# Altium PCB HeartLED.PcbDoc (part 2 of 2)
Units mm, origin at the board's own origin, x right, y up, seen from the top; angles counter-clockwise.
Board outline 86.89 x 91.89 mm, 2 copper layers (Top Layer, Bottom Layer); 133 components, 85 nets, 403 pads, 64 vias.
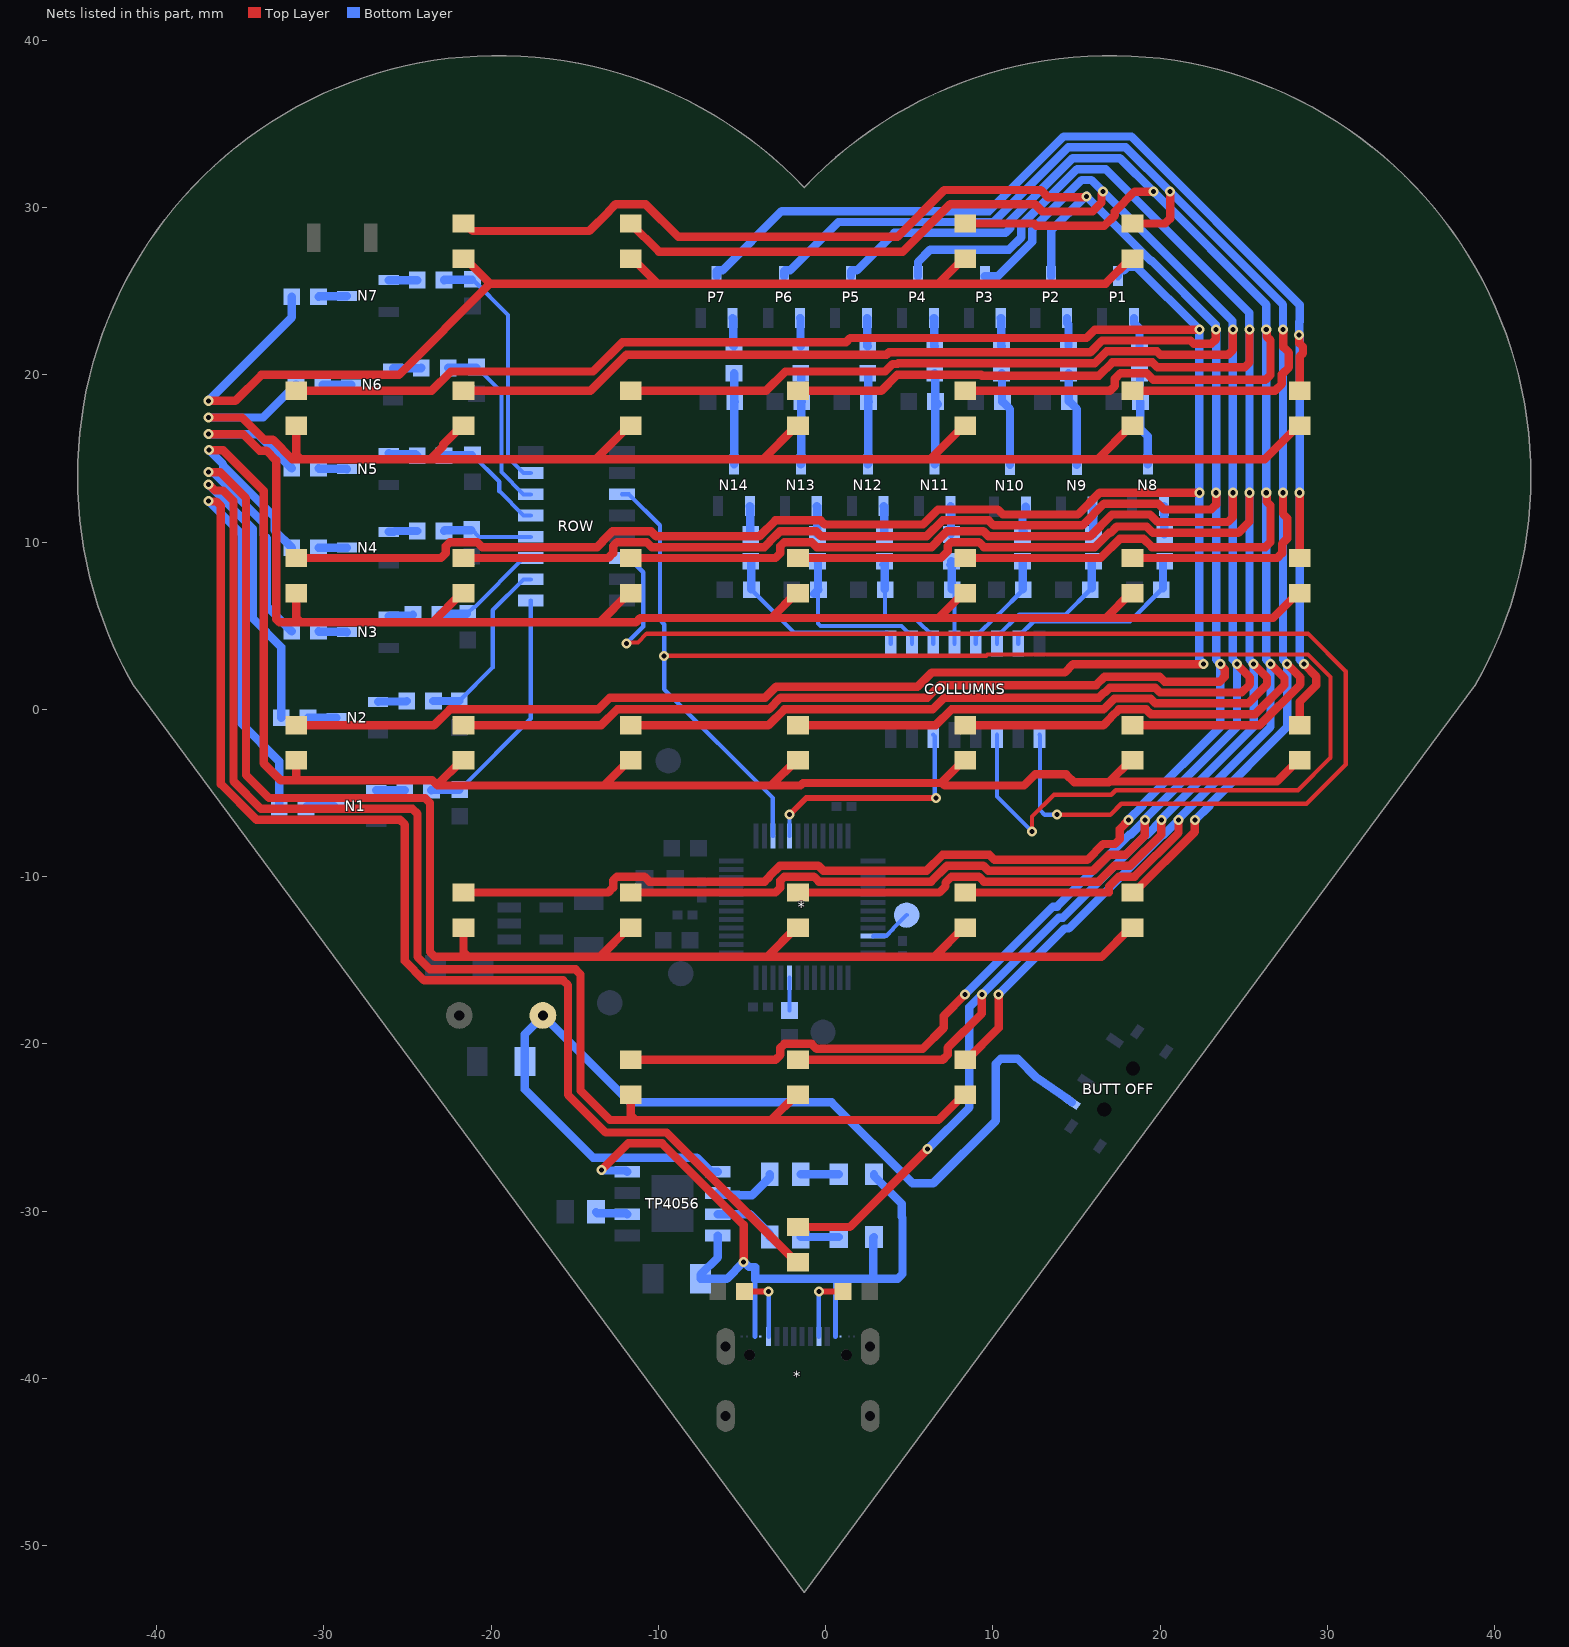
[diagram p2: the nets of this part, all layers, seen from the top]

## Via types
v1: diameter 0.6, hole 0.3, Top Layer to Bottom Layer, 64 vias

## Nets (pads, with @x,y where several pads share a name; then routed paths per layer and width w, separated by ;. In a path a pad name is that pad's centre, name@x,y a point inside that pad or via, vN(x,y) a via of type N, cw(c..) or ccw(c..) an arc to the next point about the centre after c; other vN are vias at no path point) (continued)
Net*_15: *.15 COLLUMNS.11 ROW.11 | length 96.5
  Top Layer w0.254: v1(-9.65,3.2) 9.603,3.2 9.68,3.277 28.839,3.277 30.189,1.927 30.189,-2.889 28.241,-4.838 17.348,-4.838 17.082,-5.104 13.658,-5.104 12.35,-6.413 v1(12.35,-7.3)
  Bottom Layer w0.254: ROW.11@-12.175,12.855 -11.75,12.855 -9.9,11.005 -9.9,5.339 -9.65,5.089 v1(-9.65,3.2) -9.65,1.2 -3.15,-5.3 *.15@-3.15,-7.574 *.15@-3.127,-7.551 ; COLLUMNS.11@10.255,-1.525 10.255,-5.205 v1(12.35,-7.3)
Net*_17: *.17 COLLUMNS.14 | length 14.3
  Top Layer w0.254: v1(6.6,-5.3) v1@6.625,-5.325
  Top Layer w0.35: v1(-2.15,-6.3) -1.15,-5.3 v1(6.6,-5.3)
  Bottom Layer w0.254: *.17@-2.15,-7.574 v1(-2.15,-6.3) ; COLLUMNS.14@6.445,-1.525 6.534,-1.614 6.534,-5.234 v1(6.6,-5.3)
Net*_44: *.44 R55.2 | length 2
  Bottom Layer w0.254: R55.2@-2.15,-18 *.44@-2.15,-16.05
Net*_A4: *.A4 *.A9 *.B4 *.B9 C1.2 LED35.2 LED36.2 TP4056.4 TP4056.8 | length 47.6
  Top Layer w0.5: v1(-13.4,-27.55) -11.8,-25.95 -9.769,-25.95 -4.9,-30.819 v1(-4.9,-33.05)
  Bottom Layer w0.3: *.A9@-4.205,-37.507 -4.205,-34.105 -4.15,-34.05 ; *.B9@0.601,-37.507 0.601,-34.051
  Bottom Layer w0.5: v1(-13.4,-27.55) -13.381,-27.569 -11.938,-27.569 TP4056.4@-11.862,-27.645 ; TP4056.8@-6.438,-31.455 -6.438,-32.763 -7.475,-33.8 C1.2@-7.475,-34.05 -5.9,-34.05 v1(-4.9,-33.05) -4.873,-33.05 -4.58,-33.343 -4.205,-33.343 -4.205,-34.05 -4.205,-34.105 ; -4.15,-34.05 0.6,-34.05 ; 0.601,-34.051 2.85,-34.051 ; LED36.2@2.9,-31.55 2.85,-31.6 2.85,-34.051 ; LED35.2@2.9,-27.8 2.9,-27.9 4.55,-29.55 4.55,-30.338 4.6,-30.388 4.6,-33.758 4.307,-34.051 2.85,-34.051
Net*_A5: *.A5 R53.1 | length 4.2
  Top Layer w0.35: v1(-0.4,-34.8) R53.1@1.05,-34.8
  Bottom Layer w0.254: *.A5@-0.4,-37.507 v1@-0.4,-34.8
Net*_B5: *.B5 R54.2 | length 4.2
  Top Layer w0.35: R54.2@-4.85,-34.8 v1(-3.4,-34.8)
  Bottom Layer w0.254: *.B5@-3.4,-37.507 v1(-3.4,-34.8)
NetBAT_1: "BUTT OFF.C1" BAT.1 C2.2 TP4056.5 | length 60.2
  Bottom Layer w0.5: TP4056.5@-6.438,-27.645 -6.85,-27.645 -7.695,-26.8 -13.9,-26.8 -17.975,-22.725 C2.2@-17.975,-21.05 -17.975,-19.417 -16.9,-18.342 BAT.1@-16.9,-18.3 -11.703,-23.497 0.363,-23.497 5.2,-28.334 6.441,-28.334 10.175,-24.6 10.175,-21.193 10.468,-20.9 11.5,-20.9 12.625,-22.025 14.514,-23.339 14.719,-23.482
NetCOLLUMNS_1: COLLUMNS.1 R36.2 R37.2 | length 11.6
  Bottom Layer w0.254: R37.2@-4.425,7.15 -1.848,4.573 3.682,4.573 3.905,4.35 COLLUMNS.1@3.905,3.925
  Bottom Layer w0.5: R37.2@-4.45,7.175 R36.2@-4.45,8.825
NetCOLLUMNS_2: COLLUMNS.2 R38.2 R39.2 | length 10.5
  Bottom Layer w0.254: R39.2@-0.45,7.175 -0.45,7.125 -0.45,5.126 -0.301,4.977 4.548,4.977 5.175,4.35 COLLUMNS.2@5.175,3.925
  Bottom Layer w0.5: R39.2@-0.675,6.9 -0.45,7.125 R39.2@-0.425,7.15 ; R38.2@-0.475,8.85 -0.45,8.825 R39.2@-0.45,7.175
NetCOLLUMNS_3: COLLUMNS.3 R40.2 R41.2 | length 7.5
  Bottom Layer w0.254: R40.2@3.325,8.65 R40.2@3.525,8.85 ; R41.2@3.575,7.15 3.55,7.175 3.55,5.53 3.699,5.381 5.414,5.381 6.445,4.35 COLLUMNS.3@6.445,3.925
  Bottom Layer w0.5: R40.2@3.525,8.85 3.55,8.825 R41.2@3.55,7.175
NetCOLLUMNS_4: COLLUMNS.4 R42.2 R43.2 | length 5.3
  Bottom Layer w0.254: R42.2@7.325,8.65 R42.2@7.525,8.85 ; R43.2@7.55,7.175 R43.2@7.575,7.15 7.715,7.01 COLLUMNS.4@7.715,3.925
  Bottom Layer w0.5: R42.2@7.525,8.85 7.55,8.825 R43.2@7.55,7.175
NetCOLLUMNS_5: COLLUMNS.5 R44.2 R45.2 | length 6.1
  Bottom Layer w0.254: COLLUMNS.5@8.985,3.925 8.985,4.35 10.31,5.675 10.35,5.675 R45.2@11.825,7.15 ; R44.2@11.775,8.85 11.8,8.825 R44.2@11.825,8.8
  Bottom Layer w0.5: R45.2@11.8,7.175 R44.2@11.8,8.825
NetCOLLUMNS_6: COLLUMNS.6 R46.2 R47.2 | length 8.9
  Bottom Layer w0.254: COLLUMNS.6@10.255,3.925 10.255,4.35 11.58,5.675 14.35,5.675 R47.2@15.825,7.15 ; R46.2@15.825,8.65 15.925,8.75 R46.2@16.025,8.85
  Bottom Layer w0.5: R47.2@15.925,7.25 R46.2@15.925,8.75
NetCOLLUMNS_7: COLLUMNS.7 R48.2 R49.2 | length 11.9
  Bottom Layer w0.254: COLLUMNS.7@11.525,3.925 11.525,4.35 12.446,5.271 18.196,5.271 R49.2@20.075,7.15 ; R48.2@20.075,8.65 20.175,8.75 R48.2@20.275,8.85
  Bottom Layer w0.5: R49.2@20.175,7.25 R48.2@20.175,8.75
NetCOLLUMNS_9: COLLUMNS.9 ROW.14 | length 80.2
  Top Layer w0.254: v1(-11.9,3.95) -11.847,4.003 -11.219,4.003 -10.695,4.527 28.844,4.527 31.1,2.271 31.1,-3.3 28.754,-5.646 17.683,-5.646 17.029,-6.3 v1(13.85,-6.3)
  Bottom Layer w0.254: ROW.14@-12.175,9.045 -11.75,9.045 -10.9,8.195 -10.9,4.95 v1(-11.9,3.95) ; COLLUMNS.9@12.795,-1.525 12.822,-1.552 12.822,-6.022 13.1,-6.3 v1(13.85,-6.3)
NetLED1_1: LED1.1 LED2.1 LED3.1 LED4.1 R19.2 | length 73.7
  Top Layer w0.5: v1(-36.9,18.45) -35.286,18.45 -33.736,20 -25.5,20 -20.05,25.45 ; LED1.1@-21.65,26.95 -21.55,26.95 -20.05,25.45 ; LED2.1@-11.65,26.95 -11.55,26.95 -10.05,25.45 ; LED3.1@8.35,26.95 8.25,26.95 6.75,25.45 ; LED4.1@18.35,26.95 18.25,26.95 16.75,25.45 6.75,25.45 ; -20.05,25.45 -10.05,25.45 ; -10.05,25.45 6.75,25.45
  Bottom Layer w0.5: v1(-36.9,18.45) -31.914,23.436 R19.2@-31.914,24.664
NetLED1_2: LED1.2 LED6.2 LED13.2 LED20.2 LED26.2 P2.3 | length 275
  Top Layer w0.5: LED26.2@-21.65,-10.95 -12.993,-10.95 -12.7,-10.657 -12.7,-10.234 -12.466,-10 -10.834,-10 -10.534,-10.3 -3.643,-10.3 -3.35,-10.007 -3.35,-9.965 -2.735,-9.35 -0.431,-9.35 -0.131,-9.65 6.046,-9.65 6.996,-8.7 9.8,-8.7 10.1,-9 15.65,-9 16.6,-8.05 17.307,-8.05 17.6,-7.757 17.6,-7.154 18.1,-6.654 v1(18.1,-6.627) ; LED20.2@-21.65,-0.95 -13.416,-0.95 -12.466,0 -3.385,0 -2.685,0.7 6.1,0.7 6.85,1.45 16.181,1.45 16.681,1.95 19.973,1.95 20.267,1.657 23.572,1.657 23.865,1.95 23.865,2.408 23.6,2.673 v1(23.6,2.7) ; LED13.2@-21.65,9.05 -12.993,9.05 -12.7,9.343 -12.7,9.766 -12.466,10 -10.7,10 -10.4,9.7 -3.65,9.7 -3.35,10 -3.35,10.035 -2.735,10.65 -0.565,10.65 -0.265,10.35 6.046,10.35 6.996,11.3 9.75,11.3 10.05,11 15.355,11 16.655,12.3 19.878,12.3 20.228,11.95 23.057,11.95 23.35,12.243 v1(23.35,12.95) ; LED6.2@-21.65,19.05 -14.05,19.05 -11.9,21.2 3.644,21.2 3.794,21.35 15.831,21.35 16.531,22.05 21.825,22.05 22.025,21.85 23.057,21.85 23.331,22.124 23.331,22.681 v1(23.35,22.7) ; LED1.2@-21.65,29.05 -21.55,29.05 -21.1,28.6 -14.129,28.6 -12.925,29.804 -12.925,29.824 -12.549,30.2 -10.751,30.2 -8.801,28.25 4.299,28.25 7.099,31.05 12.875,31.05 13.308,30.617 15.523,30.617 15.573,30.667 v1(15.6,30.667)
  Bottom Layer w0.5: P2.3@13.489,25.9 13.489,28.627 15.51,30.648 15.581,30.648 v1(15.6,30.667) ; v1@15.633,30.7 15.633,30.645 19.461,26.816 19.507,26.816 23.331,22.992 23.331,22.719 v1(23.35,22.7) v1(23.35,12.95) 23.35,2.977 23.6,2.727 v1(23.6,2.7) 23.6,-1.05 18.981,-5.669 18.981,-5.746 v1(18.1,-6.627)
NetLED2_2: LED2.2 LED7.2 LED14.2 LED21.2 LED27.2 LED31.2 P3.3 | length 273.6
  Top Layer w0.5: LED31.2@-11.65,-20.95 -2.993,-20.95 -2.7,-20.657 -2.7,-20.234 -2.466,-20 -0.834,-20 -0.534,-20.3 5.807,-20.3 7.069,-19.038 7.069,-18.331 v1(8.35,-17.05) ; LED27.2@-11.65,-10.95 -2.993,-10.95 -2.7,-10.657 -2.7,-10.234 -2.466,-10 -0.7,-10 -0.4,-10.3 6.315,-10.3 7.265,-9.35 9.435,-9.35 9.735,-9.65 16,-9.65 16.95,-8.7 17.942,-8.7 19.081,-7.561 19.081,-6.646 v1(19.1,-6.627) ; LED21.2@-11.65,-0.95 -3.416,-0.95 -2.466,0 6.4,0 7.1,0.7 16.35,0.7 16.657,1.007 16.703,1.007 16.996,1.3 19.704,1.3 19.997,1.007 24.88,1.007 25.366,1.493 25.366,1.907 24.6,2.673 v1(24.6,2.7) ; LED14.2@-11.65,9.05 -2.993,9.05 -2.7,9.343 -2.7,9.766 -2.466,10 -0.834,10 -0.534,9.7 6.35,9.7 6.65,10 6.65,10.035 7.265,10.65 9.435,10.65 9.735,10.35 15.831,10.35 17.131,11.65 19.4,11.65 19.85,11.2 24.057,11.2 24.35,11.493 v1(24.35,12.95) ; LED7.2@-11.65,19.05 -3.55,19.05 -2.4,20.2 3.564,20.2 4.014,20.65 4.3,20.65 4.35,20.7 16.1,20.7 16.8,21.4 19.819,21.4 20.019,21.2 24.057,21.2 24.35,21.493 v1(24.35,22.7) ; LED2.2@-11.65,29.05 -9.969,27.369 4.621,27.369 7.451,30.2 12.523,30.2 12.956,29.767 15.973,29.767 16.5,30.294 16.5,30.823 16.6,30.923 v1(16.6,30.95)
  Bottom Layer w0.5: v1(8.35,-17.05) 13.6,-11.8 13.85,-11.8 18.142,-7.508 18.219,-7.508 v1(19.1,-6.627) ; P3.3@9.525,25.9 10.3,25.9 12.35,27.95 12.35,28.69 15.31,31.65 15.89,31.65 16.59,30.95 v1(16.6,30.95) 24.331,23.219 24.331,22.719 v1(24.35,22.7) v1(24.35,12.95) 24.35,2.977 24.6,2.727 v1(24.6,2.7) 24.6,-1.05 19.1,-6.55 v1@19.062,-6.589
NetLED3_2: LED3.2 LED9.2 LED16.2 LED23.2 LED29.2 LED33.2 P5.3 | length 178.4
  Top Layer w0.5: LED33.2@8.35,-20.95 8.45,-20.95 10.35,-19.05 v1(10.35,-17.05) ; LED29.2@8.35,-10.95 16.95,-10.95 16.95,-10.584 17.534,-10 18.481,-10 21.1,-7.381 v1(21.1,-6.627) ; LED23.2@8.35,-0.95 16.607,-0.95 17.071,-0.486 17.071,-0.464 17.534,0 19.166,0 19.459,-0.293 25.688,-0.293 27.438,1.458 27.438,1.872 26.61,2.7 v1(26.6,2.7) ; LED16.2@8.35,9.05 16.45,9.05 17.6,10.2 19.012,10.2 19.512,9.7 26.307,9.7 26.6,9.993 26.6,12.2 26.369,12.431 26.369,12.931 v1(26.35,12.95) ; LED9.2@8.35,19.05 17.007,19.05 17.3,19.343 17.3,19.766 17.634,20.1 19.2,20.1 19.6,19.7 26.307,19.7 26.6,19.993 26.6,22.069 26.369,22.3 26.369,22.681 v1(26.35,22.7) ; LED3.2@8.35,29.05 12.471,29.05 12.604,28.917 16.674,28.917 17.3,29.543 17.3,29.766 18.484,30.95 v1(19.6,30.95)
  Bottom Layer w0.5: P5.3@1.525,25.9 1.525,26.2 1.575,26.25 1.875,26.25 4.113,28.488 10.757,28.488 11.05,28.781 11.05,29.228 14.772,32.95 17.6,32.95 v1(19.6,30.95) 26.35,24.2 v1(26.35,22.7) v1(26.35,12.95) 26.35,2.977 26.6,2.727 v1(26.6,2.7) 26.6,-1.05 21.1,-6.55 v1@21.061,-6.589 ; v1(10.35,-17.05) 14.3,-13.1 14.55,-13.1 20.142,-7.508 20.219,-7.508 v1(21.1,-6.627)
NetLED4_2: LED4.2 LED10.2 LED17.2 LED24.2 LED30.2 P6.3 | length 118.4
  Top Layer w0.5: LED30.2@18.35,-10.95 18.45,-10.95 22.081,-7.319 v1(22.081,-6.627) ; LED24.2@18.35,-0.95 25.95,-0.95 28.393,1.493 28.393,1.907 v1(27.6,2.7) ; LED17.2@18.35,9.05 27.007,9.05 27.3,9.343 27.3,9.9 27.6,10.2 27.6,11.436 27.35,11.686 v1(27.35,12.95) ; LED10.2@18.35,19.05 26.869,19.05 27.285,19.465 27.285,20.035 27.7,20.45 27.7,21.323 27.369,21.654 27.369,22.681 v1(27.35,22.7) ; LED4.2@18.35,29.05 20.307,29.05 20.6,29.343 v1(20.6,30.95)
  Bottom Layer w0.5: P6.3@-2.475,25.9 -2.475,26.2 -2.425,26.25 -2.125,26.25 0.763,29.138 10.057,29.138 10.35,29.431 10.35,29.448 14.502,33.6 17.95,33.6 v1(20.6,30.95) 27.35,24.2 v1(27.35,22.7) v1(27.35,12.95) 27.35,2.977 27.6,2.727 v1(27.6,2.7) 27.6,-1.05 22.971,-5.679 22.971,-5.737 v1(22.081,-6.627)
NetLED5_1: LED5.1 LED6.1 LED7.1 LED8.1 LED9.1 LED10.1 LED11.1 R16.2 | length 89.9
  Top Layer w0.5: v1(-36.9,17.45) -34.892,17.45 -33.565,16.122 -33.047,16.122 -31.875,14.95 -31.357,14.95 ; LED5.1@-31.65,16.95 -31.65,15.243 -31.357,14.95 ; LED6.1@-21.65,16.95 -21.75,16.95 -22.85,15.85 -22.85,15.75 -23.65,14.95 ; LED7.1@-11.65,16.95 -11.75,16.95 -13.75,14.95 ; LED8.1@-1.65,16.95 -1.75,16.95 -3.75,14.95 ; LED9.1@8.35,16.95 8.25,16.95 6.25,14.95 ; LED10.1@18.35,16.95 18.25,16.95 16.25,14.95 ; LED11.1@28.35,16.95 28.25,16.95 26.25,14.95 16.25,14.95 ; -31.357,14.95 -23.65,14.95 ; -23.65,14.95 -13.75,14.95 ; -13.75,14.95 -3.75,14.95 ; -3.75,14.95 6.25,14.95 ; 6.25,14.95 16.25,14.95
  Bottom Layer w0.5: v1(-36.9,17.45) -33.629,17.45 R16.2@-31.664,19.414
NetLED5_2: LED5.2 LED12.2 LED19.2 P1.3 | length 195.2
  Top Layer w0.5: LED12.2@-31.8,9.2 LED12.2@-31.65,9.05 -22.993,9.05 -22.7,9.343 -22.7,9.766 -22.466,10 -20.834,10 -20.534,9.7 -13.65,9.7 -13.35,10 -13.35,10.035 -12.735,10.65 -10.431,10.65 -10.131,10.35 -3.954,10.35 -3.004,11.3 -0.296,11.3 -0.048,11.052 5.829,11.052 6.727,11.95 10.3,11.95 10.6,11.65 15.086,11.65 16.386,12.95 v1(22.35,12.95) ; LED19.2@-31.65,-0.95 -23.416,-0.95 -22.466,0 -13.6,0 -12.9,0.7 -3.604,0.7 -2.954,1.35 5.5,1.35 6.35,2.2 14.307,2.2 14.807,2.7 v1(22.6,2.7) ; LED5.2@-31.65,19.05 -23.55,19.05 -22.4,20.2 -13.9,20.2 -12.15,21.95 1.225,21.95 1.475,22.2 15.6,22.2 16.1,22.7 v1(22.35,22.7)
  Bottom Layer w0.5: P1.3@17.489,25.9 17.489,26.2 17.539,26.25 17.839,26.25 18.039,26.45 18.6,26.45 v1(22.35,22.7) v1(22.35,12.95) 22.35,2.977 22.6,2.727 v1(22.6,2.7)
NetLED8_2: LED8.2 LED15.2 LED22.2 LED28.2 LED32.2 LED34.2 P4.3 | length 224.1
  Top Layer w0.5: LED34.2@-1.65,-30.95 1.45,-30.95 v1(6.1,-26.3) ; LED32.2@-1.65,-20.95 7.007,-20.95 7.3,-20.657 7.3,-20.234 9.35,-18.184 v1(9.35,-17.05) ; LED28.2@-1.65,-10.95 6.807,-10.95 7.171,-10.586 7.171,-10.364 7.534,-10 9.166,-10 9.466,-10.3 16.35,-10.3 16.35,-10.265 17.265,-9.35 18.212,-9.35 20.081,-7.481 20.081,-6.646 v1(20.1,-6.627) ; LED22.2@-1.65,-0.95 6.584,-0.95 7.534,0 16.615,0 17.265,0.65 19.435,0.65 19.728,0.357 25.257,0.357 26.393,1.493 26.393,1.907 v1(25.6,2.7) ; LED15.2@-1.65,9.05 6.9,9.05 7.3,9.45 7.3,9.766 7.534,10 9.166,10 9.466,9.7 16.1,9.7 16.95,10.55 17.031,10.55 17.412,10.931 19.2,10.931 19.581,10.55 24.676,10.55 25.35,11.224 v1(25.35,12.95) ; LED8.2@-1.65,19.05 3.333,19.05 4.283,20 9.3,20 9.35,19.95 16.35,19.95 17.15,20.75 19.55,20.75 19.85,20.45 25.057,20.45 25.35,20.743 v1(25.35,22.7)
  Bottom Layer w0.5: P4.3@5.525,25.9 5.525,26.75 6.26,27.485 10.965,27.485 11.7,28.219 11.7,28.959 15.041,32.3 16.75,32.3 25.331,23.719 25.331,22.719 v1(25.35,22.7) v1(25.35,12.95) 25.35,2.977 25.6,2.727 v1(25.6,2.7) 25.6,-1.05 20.1,-6.55 v1@20.061,-6.589 ; v1(6.1,-26.3) 8.6,-23.8 8.6,-17.8 v1(9.35,-17.05) 13.95,-12.45 14.2,-12.45 19.142,-7.508 19.219,-7.508 v1(20.1,-6.627)
NetLED11_2: LED11.2 LED18.2 LED25.2 P7.3 | length 76.1
  Top Layer w0.5: v1(28.308,22.391) 28.327,22.372 28.327,21.898 28.55,21.675 28.55,21.291 28.35,21.091 LED11.2@28.35,19.05 ; LED25.2@28.35,-0.95 28.35,0.45 29.35,1.45 29.35,1.95 v1(28.6,2.7) v1@28.6,2.673 ; LED18.2@28.35,9.05 v1(28.35,12.95)
  Bottom Layer w0.5: P7.3@-6.511,25.9 -6.511,26.2 -6.461,26.25 -6.161,26.25 -2.622,29.788 9.772,29.788 14.233,34.25 18.29,34.25 28.35,24.19 28.35,23.191 28.327,23.168 28.327,22.41 v1(28.308,22.391) ; v1@28.35,22.391 v1(28.35,12.95) 28.35,2.977 28.6,2.727 v1(28.6,2.7)
NetLED12_1: LED12.1 LED13.1 LED14.1 LED15.1 LED16.1 LED17.1 LED18.1 R13.2 | length 95.7
  Top Layer w0.5: v1(-36.9,16.45) -34.819,16.45 -33.842,15.472 -33.432,15.472 -32.846,14.887 -32.846,5.396 -32.65,5.2 -31.357,5.2 ; LED12.1@-31.65,6.95 -31.65,5.493 -31.357,5.2 ; LED13.1@-21.65,6.95 -21.75,6.95 -23.5,5.2 ; LED14.1@-11.65,6.95 -11.75,6.95 -13.5,5.2 ; LED15.1@-1.65,6.95 -1.75,6.95 -3.242,5.458 ; LED16.1@8.35,6.95 8.25,6.95 6.758,5.458 ; LED17.1@18.35,6.95 18.25,6.95 16.758,5.458 ; LED18.1@28.35,6.95 28.25,6.95 26.758,5.458 16.758,5.458 ; -31.357,5.2 -23.5,5.2 ; -23.5,5.2 -13.5,5.2 ; -13.5,5.2 -11.339,5.2 -11.081,5.458 -3.242,5.458 ; -3.242,5.458 6.758,5.458 ; 6.758,5.458 16.758,5.458
  Bottom Layer w0.5: v1(-36.9,16.45) -33.95,16.45 R13.2@-31.914,14.414
NetLED19_1: LED19.1 LED20.1 LED21.1 LED22.1 LED23.1 LED24.1 LED25.1 R10.2 | length 103.9
  Top Layer w0.5: v1(-36.873,15.502) -36.854,15.483 -36.011,15.483 -33.596,13.068 -33.596,-3.223 -32.573,-4.246 -31.65,-4.246 ; LED19.1@-31.65,-3.05 -31.65,-4.246 ; LED20.1@-21.65,-3.05 -21.75,-3.05 -23.226,-4.526 ; LED21.1@-11.65,-3.05 -11.75,-3.05 -13.25,-4.55 ; LED22.1@-1.65,-3.05 -1.75,-3.05 -3.25,-4.55 ; LED23.1@8.35,-3.05 8.25,-3.05 6.9,-4.4 ; LED24.1@18.35,-3.05 18.25,-3.05 16.989,-4.311 ; LED25.1@28.35,-3.05 28.25,-3.05 26.989,-4.311 16.989,-4.311 ; -31.65,-4.246 -23.506,-4.246 -23.226,-4.526 ; -23.226,-4.526 -23.202,-4.55 -13.25,-4.55 ; -13.25,-4.55 -3.25,-4.55 ; -3.25,-4.55 -1.496,-4.55 -1.346,-4.4 6.9,-4.4 ; 6.9,-4.4 6.973,-4.4 7.123,-4.55 11.863,-4.55 12.531,-3.882 14.387,-3.882 14.873,-4.369 16.931,-4.369 16.989,-4.311
  Bottom Layer w0.5: v1(-36.873,15.502) -36.027,14.656 -36.027,14.509 -35.988,14.47 -35.92,14.47 -32.95,11.5 -32.95,10.7 R10.2@-31.914,9.664
NetLED26_1: LED26.1 LED27.1 LED28.1 LED29.1 LED30.1 R7.2 | length 104.3
  Top Layer w0.5: v1(-36.9,14.201) -36.881,14.182 -36.2,14.182 -34.65,12.632 -34.65,-3.926 -33.276,-5.3 -23.943,-5.3 -23.65,-5.593 -23.65,-14.507 -23.357,-14.8 -21.357,-14.8 ; LED26.1@-21.65,-13.05 -21.65,-14.507 -21.357,-14.8 ; LED27.1@-11.65,-13.05 -11.75,-13.05 -13.5,-14.8 ; LED28.1@-1.65,-13.05 -1.75,-13.05 -3.5,-14.8 ; LED29.1@8.35,-13.05 8.25,-13.05 6.5,-14.8 ; LED30.1@18.35,-13.05 18.25,-13.05 16.5,-14.8 6.5,-14.8 ; -21.357,-14.8 -13.5,-14.8 ; -13.5,-14.8 -3.5,-14.8 ; -3.5,-14.8 6.5,-14.8
  Bottom Layer w0.5: v1(-36.9,14.201) -36.881,14.182 -36.632,14.182 -33.6,11.15 -33.6,10.431 -33.4,10.231 -33.4,6.15 R7.2@-31.914,4.664
NetLED31_1: LED31.1 LED32.1 LED33.1 R4.2 | length 100.1
  Top Layer w0.5: v1(-36.9,13.45) -36.873,13.45 -36.504,13.081 -36.018,13.081 -35.4,12.462 -35.4,-4.3 -33.75,-5.95 -24.693,-5.95 -24.4,-6.243 -24.4,-14.8 -23.65,-15.55 -14.943,-15.55 -14.65,-15.843 -14.65,-22.8 -12.9,-24.55 -11.357,-24.55 ; LED31.1@-11.65,-23.05 -11.65,-24.257 -11.357,-24.55 ; LED32.1@-1.65,-23.05 -1.75,-23.05 -3.25,-24.55 ; LED33.1@8.35,-23.05 8.25,-23.05 6.75,-24.55 -3.25,-24.55 ; -11.357,-24.55 -3.25,-24.55
  Bottom Layer w0.5: v1(-36.9,13.45) -34.25,10.8 -34.25,9.631 -34.235,9.615 -34.235,5.419 -32.546,3.73 R4.2@-32.546,-0.504
NetLED34_1: LED34.1 R1.2 | length 92.5
  Top Layer w0.5: v1(-36.9,12.45) -36.881,12.431 -36.424,12.431 -36.15,12.157 -36.15,-4.469 -34.019,-6.6 -25.443,-6.6 -25.15,-6.893 -25.15,-15.05 -24,-16.2 -15.693,-16.2 -15.4,-16.493 -15.4,-23.05 -13.15,-25.3 -9.5,-25.3 -1.75,-33.05 LED34.1@-1.65,-33.05
  Bottom Layer w0.5: v1(-36.9,12.45) -34.9,10.45 -34.9,-0.868 -32.664,-3.103 R1.2@-32.664,-5.836
NetLED35_1: LED35.1 R51.1 | length 2.3
  Bottom Layer w0.5: R51.1@-1.475,-27.8 LED35.1@0.8,-27.8
NetLED36_1: LED36.1 R52.1 | length 2.3
  Bottom Layer w0.5: R52.1@-1.475,-31.55 LED36.1@0.8,-31.55
NetN1_1: N1.1 R3.2 | length 1.7
  Bottom Layer w0.5: N1.1@-26.864,-4.836 R3.2@-25.164,-4.836
NetN1_3: N1.3 R1.1 | length 1.7
  Bottom Layer w0.254: R1.1@-31.064,-5.836 R1.1@-31.014,-5.786
  Bottom Layer w0.5: R1.1@-31.014,-5.786 N1.3@-29.364,-5.786
NetN2_1: N2.1 R6.2 | length 1.7
  Bottom Layer w0.5: N2.1@-26.746,0.446 -26.721,0.471 -25.071,0.471 R6.2@-25.046,0.496
NetN2_3: N2.3 R4.1 | length 1.7
  Bottom Layer w0.5: R4.1@-30.946,-0.504 N2.3@-29.246,-0.504
NetN3_1: N3.1 R9.2 | length 1.5
  Bottom Layer w0.5: N3.1@-26.114,5.564 -26.064,5.614 -24.714,5.614 R9.2@-24.664,5.664
NetN3_3: N3.3 R7.1 | length 1.7
  Bottom Layer w0.5: R7.1@-30.314,4.664 -30.289,4.639 -28.639,4.639 N3.3@-28.614,4.614
NetN4_1: N4.1 R12.2 | length 1.7
  Bottom Layer w0.5: N4.1@-26.114,10.614 -25.814,10.614 -25.764,10.664 R12.2@-24.414,10.664
NetN4_3: N4.3 R10.1 | length 1.7
  Bottom Layer w0.5: R10.1@-30.314,9.664 N4.3@-28.614,9.664
NetN5_1: N5.1 R15.2 | length 1.8
  Bottom Layer w0.5: N5.1@-26.114,15.314 -26.064,15.264 -24.514,15.264 R15.2@-24.414,15.164
NetN5_3: N5.3 R13.1 | length 1.7
  Bottom Layer w0.5: R13.1@-30.314,14.414 -30.289,14.389 -28.639,14.389 N5.3@-28.614,14.364
NetN6_1: N6.1 R18.1 | length 1.7
  Bottom Layer w0.5: N6.1@-25.864,20.364 -25.839,20.389 -24.189,20.389 R18.1@-24.164,20.414
NetN6_3: N6.3 R16.1 | length 1.7
  Bottom Layer w0.5: R16.1@-30.064,19.414 N6.3@-28.364,19.414
NetN7_1: N7.1 R21.2 | length 1.7
  Bottom Layer w0.5: N7.1@-26.114,25.664 R21.2@-24.414,25.664
NetN7_3: N7.3 R19.1 | length 1.7
  Bottom Layer w0.5: R19.1@-30.314,24.664 -30.289,24.689 -28.639,24.689 N7.3@-28.614,24.714
NetN8_1: N8.1 R48.1 | length 1.8
  Bottom Layer w0.254: R48.1@20.225,10.5 20.25,10.475 R48.1@20.275,10.45
  Bottom Layer w0.5: N8.1@20.225,12.15 20.25,12.125 R48.1@20.25,10.475
NetN8_3: N8.3 R22.2 R23.2 | length 5.7
  Bottom Layer w0.5: R22.2@18.775,20.1 18.8,20.075 18.8,18.425 R23.2@18.825,18.4 18.825,16.775 19.275,16.325 N8.3@19.275,14.65
NetN9_1: N9.1 R46.1 | length 1.7
  Bottom Layer w0.254: R46.1@15.975,10.5 16,10.475 R46.1@16.025,10.45
  Bottom Layer w0.5: N9.1@15.975,12.114 16,12.089 R46.1@16,10.475
NetN9_3: N9.3 R24.2 R25.2 | length 5.7
  Bottom Layer w0.5: R25.2@14.525,20.1 14.55,20.075 14.55,18.425 R24.2@14.575,18.4 15.025,17.95 N9.3@15.025,14.614
NetN10_1: N10.1 R44.1 | length 2
  Bottom Layer w0.254: R44.1@11.775,10.45 R44.1@11.975,10.65
  Bottom Layer w0.5: R44.1@11.775,10.45 11.775,11.614 11.975,11.814 N10.1@11.975,12.114
NetN10_3: N10.3 R26.2 R27.2 | length 5.7
  Bottom Layer w0.5: R27.2@10.525,20.1 10.55,20.075 10.55,18.425 R26.2@10.575,18.4 11.025,17.95 N10.3@11.025,14.614
NetN11_1: N11.1 R42.1 | length 1.8
  Bottom Layer w0.254: R42.1@7.475,10.5 7.5,10.475 R42.1@7.525,10.45
  Bottom Layer w0.5: N11.1@7.475,12.15 7.5,12.125 R42.1@7.5,10.475
NetN11_3: N11.3 R28.2 R29.2 | length 5.7
  Bottom Layer w0.5: N11.3@6.525,14.65 6.55,14.675 6.55,18.375 R28.2@6.575,18.4 ; R29.2@6.525,20.1 6.55,20.075 6.55,18.425 R28.2@6.575,18.4 ; R28.2@6.725,18.25 R28.2@6.575,18.4
NetN12_1: N12.1 R40.1 | length 1.8
  Bottom Layer w0.254: R40.1@3.475,10.5 3.5,10.475 R40.1@3.525,10.45
  Bottom Layer w0.5: N12.1@3.475,12.15 3.5,12.125 R40.1@3.5,10.475
NetN12_3: N12.3 R30.2 R31.2 | length 5.5
  Bottom Layer w0.5: N12.3@2.525,14.65 2.55,14.675 2.55,18.375 R30.2@2.575,18.4 2.55,18.425 2.55,20.075 R31.2@2.525,20.1
NetN13_1: N13.1 R38.1 | length 1.8
  Bottom Layer w0.254: R38.1@-0.525,10.5 -0.5,10.475 R38.1@-0.475,10.45
  Bottom Layer w0.5: N13.1@-0.525,12.15 -0.5,12.125 R38.1@-0.5,10.475
NetN13_3: N13.3 R32.2 R33.2 | length 5.5
  Bottom Layer w0.5: N13.3@-1.475,14.65 -1.45,14.675 -1.45,18.375 R32.2@-1.425,18.4 -1.45,18.425 -1.45,20.075 R33.2@-1.475,20.1
NetN14_1: N14.1 R36.1 | length 1.7
  Bottom Layer w0.5: N14.1@-4.525,12.15 -4.5,12.125 -4.5,10.475 R36.1@-4.475,10.45
NetN14_3: N14.3 R34.2 R35.2 | length 5.5
  Bottom Layer w0.5: N14.3@-5.475,14.65 -5.45,14.675 -5.45,18.375 R34.2@-5.425,18.4 -5.45,18.425 -5.45,20.075 R35.2@-5.475,20.1
NetP1_1: P1.1 R22.1 | length 1.8
  Bottom Layer w0.5: P1.1@18.439,23.4 18.439,23.1 18.775,22.764 R22.1@18.775,21.7
NetP2_1: P2.1 R25.1 | length 1.7
  Bottom Layer w0.5: P2.1@14.439,23.4 14.439,23.1 14.525,23.014 R25.1@14.525,21.7
NetP3_1: P3.1 R27.1 | length 1.7
  Bottom Layer w0.5: P3.1@10.475,23.4 10.5,23.375 10.5,21.725 R27.1@10.525,21.7
NetP4_1: P4.1 R29.1 | length 1.7
  Bottom Layer w0.5: P4.1@6.475,23.4 6.5,23.375 6.5,21.725 R29.1@6.525,21.7
NetP5_1: P5.1 R31.1 | length 1.7
  Bottom Layer w0.5: P5.1@2.475,23.4 2.5,23.375 2.5,21.725 R31.1@2.525,21.7
NetP6_1: P6.1 R33.1 | length 1.7
  Bottom Layer w0.5: P6.1@-1.525,23.4 -1.5,23.375 -1.5,21.725 R33.1@-1.475,21.7
NetP7_1: P7.1 R35.1 | length 1.7
  Bottom Layer w0.5: P7.1@-5.561,23.4 -5.518,23.357 -5.518,21.743 R35.1@-5.475,21.7
NetR2_2: R2.2 R3.1 ROW.1 | length 14.8
  Bottom Layer w0.245: R2.2@-21.889,-4.811 R2.2@-21.864,-4.786 -17.625,-0.546 ROW.1@-17.625,6.505
  Bottom Layer w0.5: R3.1@-23.564,-4.836 -23.539,-4.811 R2.2@-21.889,-4.811
NetR5_2: R5.2 R6.1 ROW.2 | length 10.8
  Bottom Layer w0.245: R5.2@-21.9,0.5 -19.9,2.5 -19.9,5.925 -18.05,7.775 ROW.2@-17.625,7.775
  Bottom Layer w0.5: R6.1@-23.446,0.496 -23.444,0.498 R5.2@-21.902,0.498
NetR8_2: R8.2 R9.1 ROW.3 | length 6.8
  Bottom Layer w0.245: R8.2@-21.4,5.75 -21.022,6.127 -20.967,6.127 -18.05,9.045 ROW.3@-17.625,9.045
  Bottom Layer w0.5: R9.1@-23.064,5.664 -23.022,5.707 R8.2@-21.443,5.707
NetR11_2: R11.2 R12.1 ROW.4 | length 5.3
  Bottom Layer w0.245: R11.2@-21.15,10.75 -20.715,10.315 ROW.4@-17.625,10.315
  Bottom Layer w0.5: R12.1@-22.814,10.664 -22.772,10.707 R11.2@-21.193,10.707
NetR14_2: R14.2 R15.1 ROW.5 | length 7
  Bottom Layer w0.245: R14.2@-21.114,15.214 -19.507,13.607 -19.507,13.042 -18.05,11.585 ROW.5@-17.625,11.585
  Bottom Layer w0.5: R15.1@-22.814,15.164 -22.789,15.189 R14.2@-21.139,15.189
NetR17_2: R17.2 R18.2 ROW.6 | length 10.9
  Bottom Layer w0.245: R17.2@-20.889,20.439 -20.839,20.439 -19.382,18.982 -19.382,14.187 -18.05,12.855 ROW.6@-17.625,12.855
  Bottom Layer w0.5: R18.2@-22.564,20.414 -22.539,20.439 R17.2@-20.889,20.439
NetR20_2: R20.2 R21.1 ROW.7 | length 15
  Bottom Layer w0.245: R20.2@-21.114,25.714 -18.987,23.587 -18.987,15.062 -18.05,14.125 ROW.7@-17.625,14.125
  Bottom Layer w0.5: R21.1@-22.814,25.664 -22.789,25.689 R20.2@-21.139,25.689
NetR50_1: R50.1 TP4056.2 | length 1.9
  Bottom Layer w0.5: R50.1@-13.725,-30.05 -13.658,-30.117 -11.929,-30.117 TP4056.2@-11.862,-30.185
NetR51_2: R51.2 TP4056.6 | length 3.8
  Bottom Layer w0.5: TP4056.6@-6.438,-28.915 -6.338,-29.015 -5.185,-29.015 -5.15,-29.05 -4.4,-29.05 -3.325,-27.975 R51.2@-3.325,-27.8
NetR52_2: R52.2 TP4056.7 | length 3.8
  Bottom Layer w0.5: TP4056.7@-6.438,-30.185 -4.515,-30.185 -3.325,-31.375 R52.2@-3.325,-31.55
SWDIO: *.34 pad.6 | length 2.6
  Bottom Layer w0.254: *.34@2.838,-13.562 2.861,-13.539 3.64,-13.539 4.038,-13.142 4.038,-13.112 pad.6@4.85,-12.3
pads on no net: "3,3v STABLE.4" "BUTT OFF.A1" "BUTT OFF.MH1" "BUTT OFF.MH2" "BUTT OFF.MP1" "BUTT OFF.MP2" "BUTT OFF.MP3" "BUTT OFF.MP4" *.2@-5.638,-14.062 *.3 *.4 *.5 *.6 *.10 *.11 *.13 *.16 *.18 *.19 *.20 *.21 *.22 *.25 *.26 *.27 *.28 *.29 *.30 *.31 *.32 *.33 *.38 *.39 *.40 *.41 *.42 *.43 *.45 *.46 *.A6 *.A7 *.A8 *.B6 *.B7 *.B8 COLLUMNS.15 ROW.9 ROW.15

## Polygon pours and split planes (outlines as drawn)
GND on Top Layer "GND_L01_P013" (solid, pour order 13): -1.275,-52.8 -41.4,1.45 cw(c-19.571,13.942) -1.275,31.2 cw(c17.021,13.942) 38.85,1.45
GND on Bottom Layer "GND_L02_P014" (solid, remove dead copper, pour order 14): -1.275,-52.8 -41.4,1.45 cw(c-19.571,13.942) -1.275,31.2 cw(c17.021,13.942) 38.85,1.45

## Silkscreen, mask and mechanical layers (free items; w line width, h text height)
Mechanical 13:
  lines w0.254: -2.4,-45.3 -0.65,-45.3 ; -1.15,-52.8 -1.4,-52.8 ; -1.4,-52.8 -1.4,-52.8 ; -41.4,1.45 cw(c-19.571,13.942) -1.275,31.2 cw(c17.021,13.942) 38.85,1.45 -1.275,-52.8 -41.4,1.45

## Text inside footprints (layer, text, board x,y; h text height)
BAT: Bottom Overlay "-" at -23.52,-18.58 h0.8; Bottom Overlay "+" at -15.02,-18.313 h0.8